# Altium PCB Sub_B_PCB_2.PcbDoc
Units mil, origin at the board's own origin, x right, y up, seen from the top; angles counter-clockwise.
Board outline 2500 x 1500 mil, 2 copper layers (Top Layer, Bottom Layer); 37 components, 25 nets, 105 pads, 26 vias.
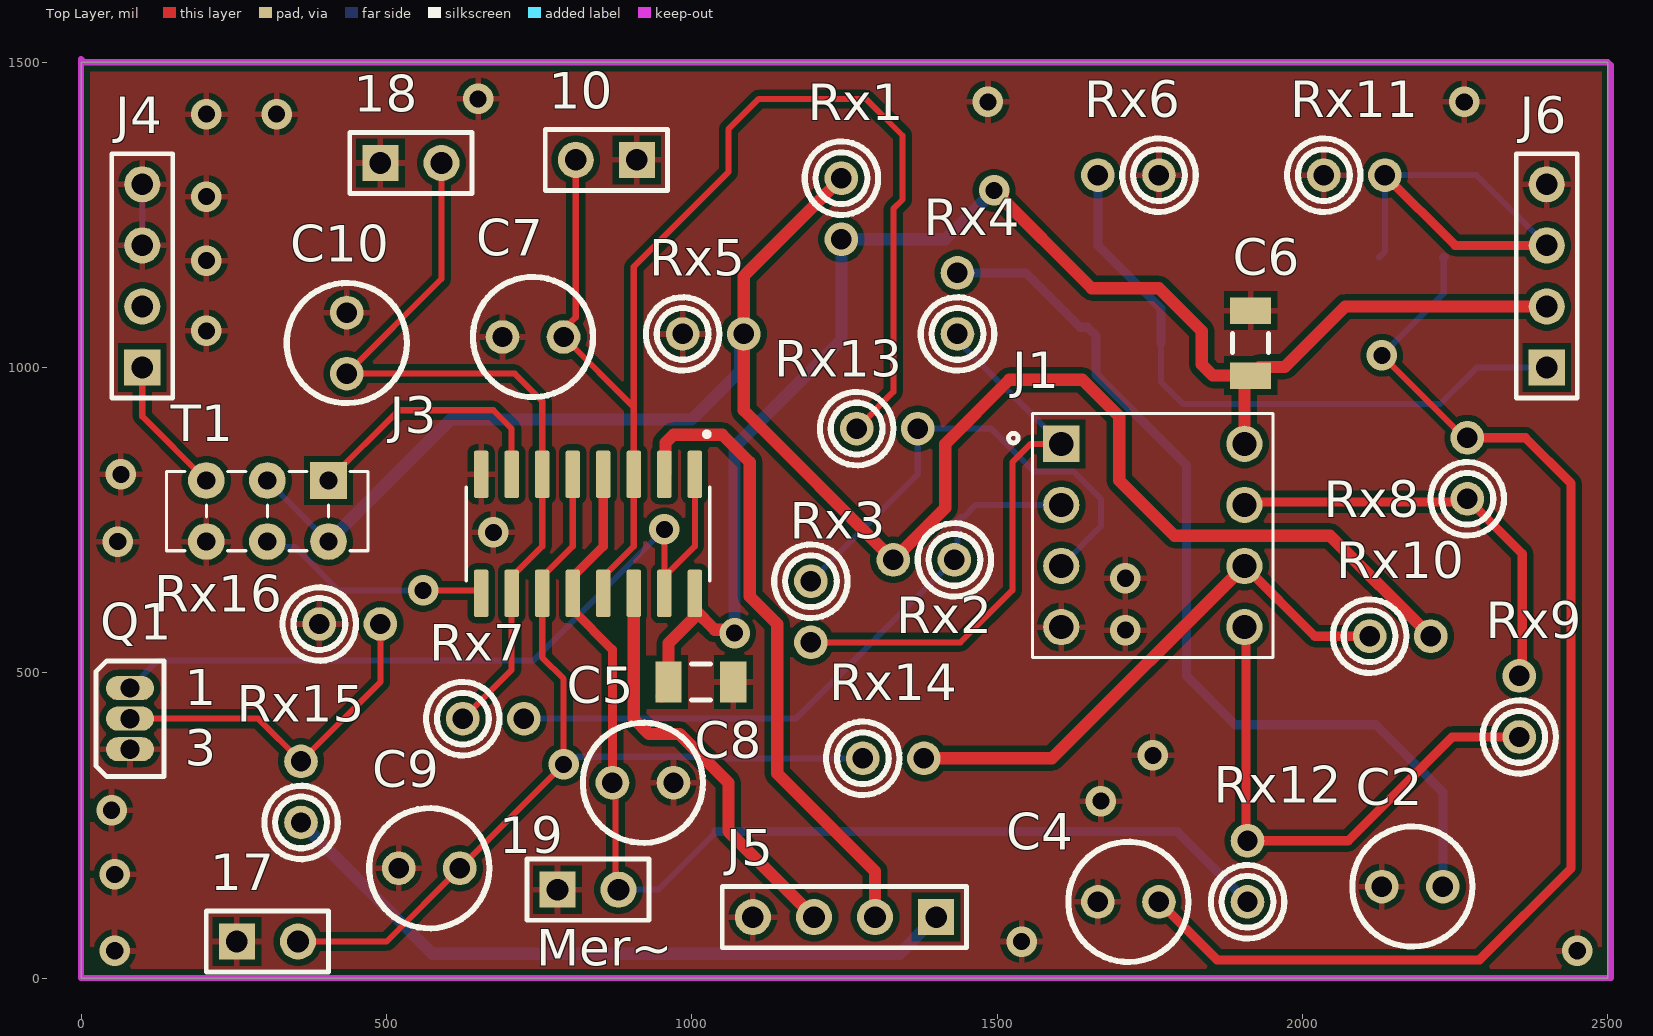
[diagram p0: Top Layer view]
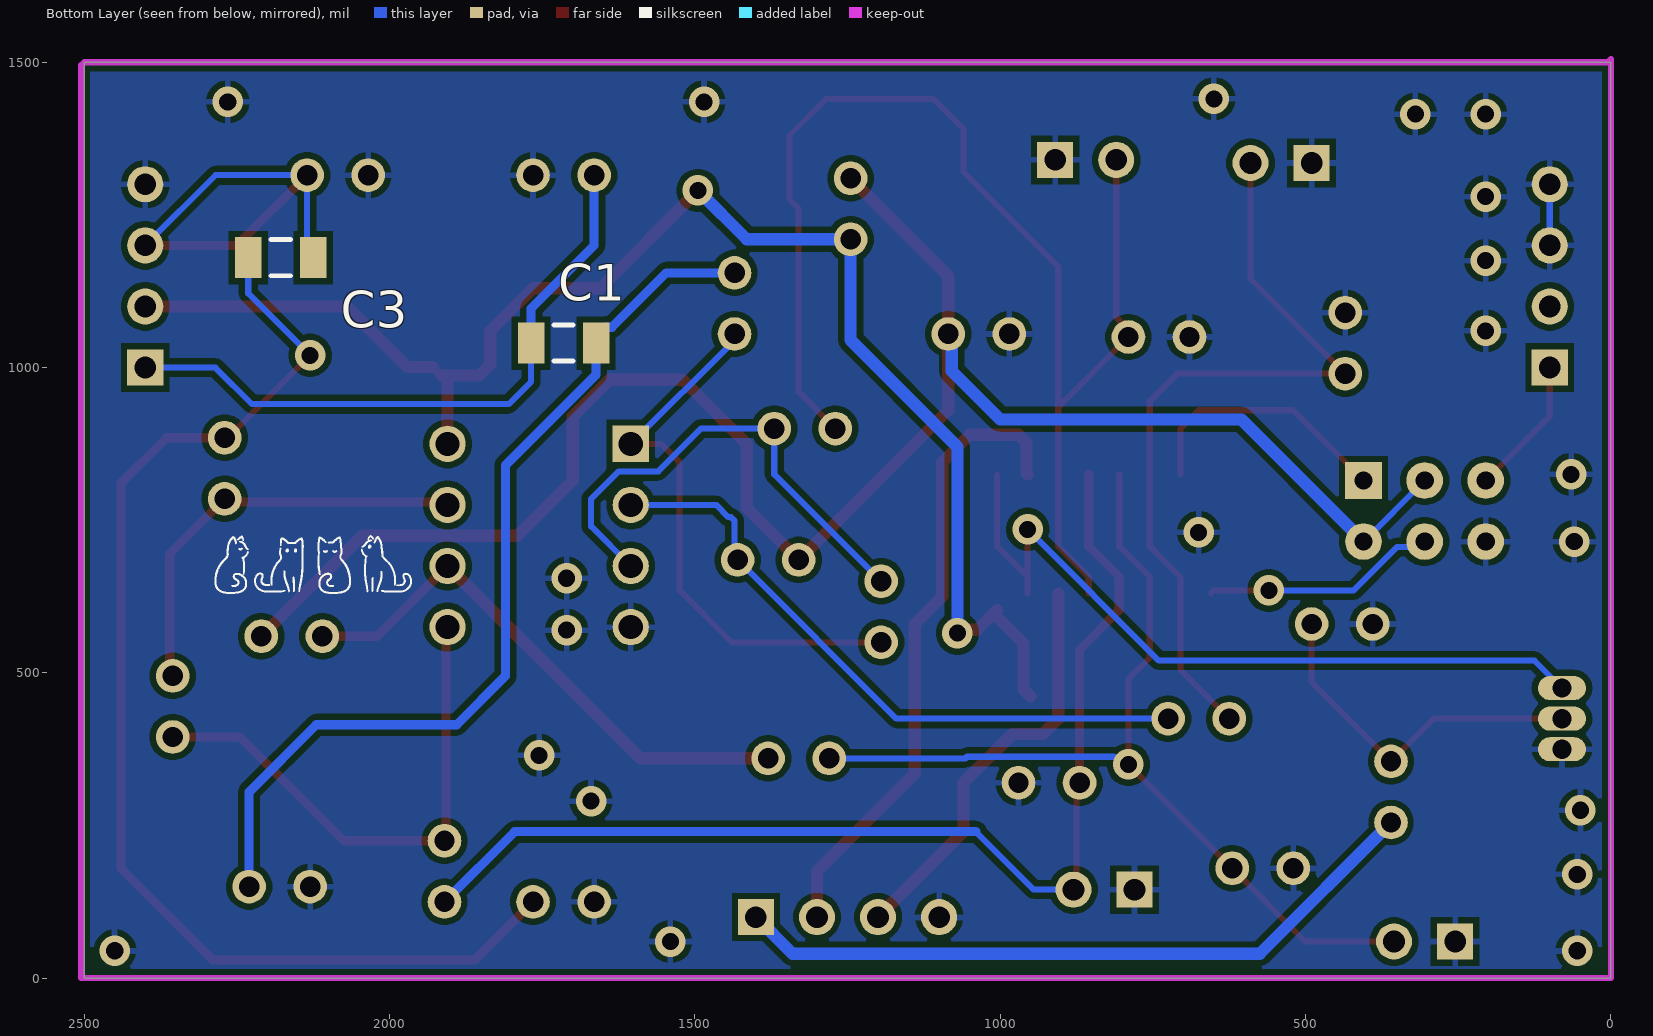
[diagram p1: Bottom Layer view, seen from below]

## Layer stack, top to bottom
Top Solder: solder mask 0.4, Solder Resist, Dk 3.5
Top Layer: signal copper 1.4
Dielectric 1: dielectric 12.6, FR-4, Dk 4.8
Bottom Layer: signal copper 1.4
Bottom Solder: solder mask 0.4, Solder Resist, Dk 3.5

## Board outline
0,0 0,1500 2500,1500 2500,0

## Design rules (kind name [scope] priority, off if disabled: settings)
Clearance [All] p1: gap=10 ignorepadtopadclearanceinfootprint=FALSE except(0: Arc-Hole Track-Hole SMDPad-Hole THPad-Hole Via-Hole Fill-Hole Poly-Hole Region-Hole Text-Hole)
HoleSize [All] p1: absolutevalues=TRUE maxlimit=900 minlimit=12 maxpercent=80.000 minpercent=20.000
MinimumSolderMaskSliver [All] p1: minsoldermaskwidth=1
PolygonConnect [All] p1: connectstyle=Relief reliefconductorwidth=10 reliefentries=4 polygonreliefangle="90 Angle" airgapwidth=10
RoutingVias [All] p1: holewidth=12 width=24 viastyle="Through Hole" minholewidth=12 minwidth=24 maxholewidth=100 maxwidth=200
SilkToSilkClearance [All] p1: silktosilkclearance=0
SilkToSolderMaskClearance [IsPad] p1: minsilkscreentomaskgap=1 clearancetoexposedcopper=TRUE
SolderMaskExpansion [All] p1: expansion=4 istentingtop=FALSE
Width [All] p1: maxlimit=200 minlimit=10 preferedwidth=10
26 further rules are at their usual default settings.

## Components (designator, comment, footprint, x,y, rotation, side; value= is the part's Value field where it differs from the comment)
10 "BUS1_0_TP" HDR1X2 910,1340 r180 top
17 "BUS1_270_TP" HDR1X2 255,60 r0 top
18 "BUS1_180_TP" HDR1X2 490,1335 r0 top
19 "BUS1_90_TP" HDR1X2 780,145 r0 top
C1 "Cap" 1206#1 1715,1040 r0 bottom value=10UF
C2 "Cap" RADIAL-0.1 2180,150 r0 top value=100PF
C3 "Cap" 1206#1 2178.17,1179.98 r180 bottom value=10UF
C4 "Cap" RADIAL-0.1 1715,125 r0 top value=100PF
C5 "Cap" 1206#2 1015,485 r180 top value=10UF
C6 "Cap" 1206#1 1915,1040 r270 top value=10UF
C7 "Cap" RADIAL-0.1 740,1050 r0 top value=0.22UF
C8 "Cap" RADIAL-0.1 920,320 r180 top value=0.22UF
C9 "Cap" RADIAL-0.1 570,180 r0 top value=0.22UF
C10 "Cap" RADIAL-0.1 435,1040 r270 top value=0.22UF
J1 "OP_AMP_SOCKET" TE_1-2199298-2 1755,725 r0 top
J3 "FST3253" SOIC127P600X175-16N 830,727.56 r270 top
J4 "Header 4" HDR1X4 100,1000 r90 top
J5 "Header 4" HDR1X4 1400,100 r180 top
J6 "Header 4" HDR1X4 2400,1000 r90 top
Q1 "MOSFET-N" E3 80,425 r0 top
Rx1 "Res1" AXIAL-0.1-RES 1245,1260 r270 top value=100K
Rx2 "Res1" AXIAL-0.1-RES 1380,685 r180 top value=3.3K
Rx3 "Res1" AXIAL-0.1-RES 1195,600 r270 top value=3.3K
Rx4 "Res1" AXIAL-0.1-RES 1435,1105 r90 top value=15K
Rx5 "Res1" AXIAL-0.1-RES 1035,1055 r0 top value=100K
Rx6 "Res1" AXIAL-0.1-RES 1715,1315 r180 top value=100K
Rx7 "Res1" AXIAL-0.1-RES 675,425 r0 top value=56
Rx8 "Res1" AXIAL-0.1-RES 2270,835 r90 top value=15K
Rx9 "Res1" AXIAL-0.1-RES 2355,445 r90 top value=3.3K
Rx10 "Res1" AXIAL-0.1-RES 2160,560 r0 top value=3.3K
Rx11 "Res1" AXIAL-0.1-RES 2085,1315 r0 top value=100K
Rx12 "Res1" AXIAL-0.1-RES 1910,175 r90 top value=56
Rx13 "Res1" AXIAL-0.1-RES 1320,900 r0 top value=56
Rx14 "Res1" AXIAL-0.1-RES 1330,360 r0 top value=56
Rx15 "Res1" AXIAL-0.1-RES 360,305 r90 top value=12K
Rx16 "Res1" AXIAL-0.1-RES 440,580 r0 top value=22K
T1 "Trans CT" BIFILAR-2402 405,815 r180 top

## Footprints (in the part's own frame and the unit in brackets; to place one, negate y for a bottom-side part, rotate by r counter-clockwise, add the part's x,y. Pads: shape width x height; smd on the part's side, far side on the other; paste and mask are expansions set on the pad)
1206#1 [mm] "Chip Capacitor, Body 3.2x1.6mm, IPC High Density"
  rect 1.1x1.7 smd: 1(-1.35,0) 2(1.35,0)
  silkscreen extent -0.4,-0.75 0.4,0.75, body extent -1.7,-0.9 1.7,0.9, height 1.3
1206#2 [mm] "Chip Capacitor, Body 3.2x1.6mm, IPC High Density"
  rect 1.1x1.7 smd: 2(1.35,0) 3(-1.35,0)
  silkscreen extent -0.4,-0.75 0.4,0.75, body extent -1.7,-0.9 1.7,0.9, height 1.3
AXIAL-0.1-RES [mm] "Axial Device, Thru-Hole; 2 Leads; 0.3 in Pin Spacing"
  round 1.4 hole 0.85: 1(-1.27,0) 2(1.27,0)
  silkscreen extent -2.8,-1.53 0.26,1.53
BIFILAR-2402 [mil]
  rect 60x60 hole 30: 1(0,0)
  round 60 hole 30: 2(0,100) 2(100,0) 3(100,100) 4(200,0) 5(200,100)
  silkscreen extent -65,-15 265,115
E3 [mm] "TO, Flat Index; 3 In-Line, Axial Leads; Body Dia. 4.6mm; Lead Dia. 0.5 mm (max)"
  oval 2x1 hole 0.8: 1(0,1.27) 2(0,0) 3(0,-1.27)
  silkscreen extent -1.41,-2.41 1.41,2.41
HDR1X2 [mm] "Connector; Header; 2 Position"
  rect 1.5x1.5 hole 0.9: 1(0,0)
  round 1.5 hole 0.9: 2(2.54,0)
  silkscreen extent -1.27,-1.27 3.81,1.27
HDR1X4 [mm] "Connector; Header; 4 Position"
  rect 1.5x1.5 hole 0.9: 1(0,0)
  round 1.5 hole 0.9: 2(2.54,0) 3(5.08,0) 4(7.62,0)
  silkscreen extent -1.27,-1.27 8.89,1.27
RADIAL-0.1 [mm] "Axial Device, Thru-Hole; 2 Leads; 0.3 in Pin Spacing"
  round 1.4 hole 0.85: 1(-1.27,0) 2(1.27,0)
  silkscreen extent -2.5,-2.5 2.5,2.5
SOIC127P600X175-16N [mm]
  rrect25% 1.97x0.6 smd: 1(-2.475,4.445) 2(-2.475,3.175) 3(-2.475,1.905) 4(-2.475,0.635) 5(-2.475,-0.635) 6(-2.475,-1.905) 7(-2.475,-3.175) 8(-2.475,-4.445) 9(2.475,-4.445) 10(2.475,-3.175) 11(2.475,-1.905) 12(2.475,-0.635) 13(2.475,0.635) 14(2.475,1.905) 15(2.475,3.175) 16(2.475,4.445)
  silkscreen extent -4.24,-5.06 1.95,5.06
TE_1-2199298-2 [mm]
  rect 1.508x1.508 hole 1: 1(-3.81,3.81)
  round 1.508 hole 1: 2(-3.81,1.27) 3(-3.81,-1.27) 4(-3.81,-3.81) 5(3.81,-3.81) 6(3.81,-1.27) 7(3.81,1.27) 8(3.81,3.81)
  silkscreen extent -6,-5.08 5,5.08

## Part data
10 17 18 19: library part "Header 2", "Header, 2-Pin", LatestRevisionDate=17-Jul-2002, LatestRevisionNote="Re-released for DXP Platform.", Publisher="Altium Limited"
C1 C3 C5 C6: library part "CAP CER 10UF 16V X5R 1206", "Capacitor", Manufacturer Part Number=885012108017, Voltage Rating=16V, LatestRevisionDate=17-Jul-2002, LatestRevisionNote="Re-released for DXP Platform.", Published=8-Jun-2000, Publisher="Altium Limited"
C2 C4: library part "CAP CER 100PF 50V C0G/NP0 RADIAL", "Capacitor", Manufacturer Part Number=K101K15C0GF53L2, Voltage Rating=50V, LatestRevisionDate=17-Jul-2002, LatestRevisionNote="Re-released for DXP Platform.", Published=8-Jun-2000, Publisher="Altium Limited"
C7 C8 C9 C10: library part "CAP CER 0.22UF 50V Z5U RADIAL", "Capacitor", Manufacturer Part Number=C320C224M5U5TA, Voltage Rating=50V, LatestRevisionDate=17-Jul-2002, LatestRevisionNote="Re-released for DXP Platform.", Published=8-Jun-2000, Publisher="Altium Limited"
J1: library part 1-2199298-2, "8 _2 x 4_ Pos DIP, 0.3 _7.62mm_ Row Spacing Socket Tin Through Hole", Package=None, Availability=Unavailable, MF="TE Connectivity", MP=1-2199298-2, Price=None, SnapEDA_Link=https://www.snapeda.com/parts/1-2199298-2/TE%20Connectivity%20AMP%20Connectors/view-part/2761758/?ref=snap, Supplier 1=RSComponents, Supplier 2=RSComponents, Supplier Part Number 2=6742435, TE_purchase_URL=https://www.te.com/usa-en/product-1-2199298-2.html?te_bu=Cor&te_type=disp&te_campaign=seda_glo_cor-seda-global-disp-prtnr-fy19-seda-model-bom-cta_sma-317_1&elqCampaignId=32493
J3: "Multiplekser/demultiplekser 2 x 4:1 16-TSSOP", Package="TSSOP-16 ON Semiconductor", Availability="In Stock", Check_prices=https://www.snapeda.com/parts/FST3253/Onsemi/view-part/?ref=eda, MF="ON Semiconductor", MP=FST3253, Price=None, Purchase-URL=https://pricing.snapeda.com/search/part/FST3253/?ref=eda, SnapEDA_Link=https://www.snapeda.com/parts/FST3253/Onsemi/view-part/?ref=snap
J4 J5 J6: "Header, 4-Pin", LatestRevisionDate=17-Jul-2002, LatestRevisionNote="Re-released for DXP Platform.", Publisher="Altium Limited"
Q1: "N-Channel MOSFET", Supplier Part Number 1=BS170-D74Z, LatestRevisionDate=17-Jul-2002, LatestRevisionNote="Re-released for DXP Platform.", PackageDescription="TO, Flat Index; 3 In-Line, Axial Leads; Body Dia. 4.6mm; Lead Dia. 0.5 mm (max)", PackageReference=E3, PackageVersion=1995/1996, Published=8-Jun-2000, Publisher="Altium Limited", Supplier 1=Avnet
Rx1 Rx5 Rx6 Rx11: library part "RES 100K OHM 5% 1/4W AXIAL", "Resistor", Manufacturer Part Number=CFR-25JB-52-100K, Power Rating=1/4W, Tolerance=0.05, LatestRevisionDate=17-Jul-2002, LatestRevisionNote="Re-released for DXP Platform.", Published=8-Jun-2000, Publisher="Altium Limited"
Rx2 Rx3 Rx9 Rx10: library part "RES 3.3K OHM 5% 1/4W AXIAL", "Resistor", Manufacturer Part Number=CFR-25JB-52-3K3, Power Rating=1/4W, Tolerance=0.05, LatestRevisionDate=17-Jul-2002, LatestRevisionNote="Re-released for DXP Platform.", Published=8-Jun-2000, Publisher="Altium Limited"
Rx4 Rx8: library part "RES 15K OHM 5% 1/4W AXIAL", "Resistor", Manufacturer Part Number=CFR-25JB-52-15K, Power Rating=1/4W, Tolerance=0.05, LatestRevisionDate=17-Jul-2002, LatestRevisionNote="Re-released for DXP Platform.", Published=8-Jun-2000, Publisher="Altium Limited"
Rx7 Rx12 Rx13 Rx14: library part "RES 56 OHM 5% 1/4W AXIAL", "Resistor", Manufacturer Part Number=CFR-25JB-52-56R, Power Rating=1/4W, Tolerance=0.05, LatestRevisionDate=17-Jul-2002, LatestRevisionNote="Re-released for DXP Platform.", Published=8-Jun-2000, Publisher="Altium Limited"
Rx15: library part "RES 12K OHM 5% 1/4W AXIAL", "Resistor", Manufacturer Part Number=CFR-25JB-52-12K, Power Rating=1/4W, Tolerance=0.05, LatestRevisionDate=17-Jul-2002, LatestRevisionNote="Re-released for DXP Platform.", Published=8-Jun-2000, Publisher="Altium Limited"
Rx16: library part "RES 22K OHM 5% 1/4W AXIAL", "Resistor", Manufacturer Part Number=CFR-25JB-52-22K, Power Rating=1/4W, Tolerance=0.05, LatestRevisionDate=17-Jul-2002, LatestRevisionNote="Re-released for DXP Platform.", Published=8-Jun-2000, Publisher="Altium Limited"
T1: library part "Centre-tapped transformer wound on a binocular core", "Center-Tapped Transformer (Coupled Inductor Model)", LatestRevisionDate=17-Jul-2002, LatestRevisionNote="Re-released for DXP Platform.", Published=8-Jun-2000, Publisher="Altium Limited"

## Via types
v1: diameter 50, hole 28, Top Layer to Bottom Layer, 22 vias
v2: diameter 50, hole 28, Top Layer to Bottom Layer, tented top, 4 vias

## Nets (pads, with @x,y where several pads share a name; then routed paths per layer and width w, separated by ;. In a path a pad name is that pad's centre, name@x,y a point inside that pad or via, vN(x,y) a via of type N, cw(c..) or ccw(c..) an arc to the next point about the centre after c; other vN are vias at no path point)
GND: 10.1 17.1 18.1 19.1 C2.1 C4.1 C5.3 C6.1 C7.1 C8.1 C9.1 C10.1 J1.4 J3.8 J4.3 J4.4 J5.4 J6.4 Q1.3 Rx5.1 Rx6.1 Rx11.1 Rx16.1 T1.5 | length 100
  Bottom Layer w10: J4.3 J4.4
  other v1: 55,45 2450,45 1540,60 55,170 50,275 1670,290 1755,365 60,715 65,825 205,1060 205,1175 205,1280 205,1415 320,1415 1485,1435 2265,1435 650,1440
  other v2: 1710,570 1710,655 675,730
Net10_2: 10.2 C7.2 J3.3 J3.13 Rx13.1 | length 2147.3
  Top Layer w10: 10.2 810,1082.21 790,1062.21 C7.2 905,935 ; J3.13 855,657.09 905,707.09 J3.3 905,935 ; Rx13.1 1330,960 1330,1260 1345,1275 1345,1380 1285,1440 1110,1440 1060,1390 1060,1320 905,1165 905,935
Net17_2: 17.2 C9.2 J3.5 J3.11 Rx14.1 | length 1561.6
  Top Layer w10: 17.2 500,60 C9.2 v1(790,350) 790,490 755,525 J3.11 755,657.09 805,707.09 J3.5
  Bottom Layer w10: v1(790,350) 800.82,350 813.38,362.56 1054.49,362.56 1057.04,360 Rx14.1
Net18_2: 18.2 C10.2 J3.6 J3.10 Rx7.1 | length 1321.7
  Top Layer w10: 18.2 590,1145 C10.2 710,990 755,945 J3.6 755,707.09 705,657.09 J3.10 705,505 Rx7.1
Net19_2: 19.2 C8.2 J3.4 J3.12 Rx12.1 | length 1848.8
  Top Layer w10: C8.2 875,315 875,150 19.2
  Top Layer w15: J3.4 855,707.09 805,657.09 J3.12 805,603.15 870,538.15 C8.2
  Bottom Layer w10: 19.2 945,145 1040,240
  Bottom Layer w15: 1040,240 1795,240 Rx12.1
NetC1_1: C1.1 C2.2 Rx4.2 | length 1541.5
  Bottom Layer w15: Rx4.2 1546.85,1155 1635.89,1065.96 1647.7,1065.96 1661.85,1051.81 C1.1 1661.85,988.15 1810,840 1810,495 1890,415 2120,415 2230,305 C2.2
NetC1_2: C1.2 J6.1 Rx6.2 | length 1052.8
  Bottom Layer w10: C1.2 1768.15,976.85 1805,940 2225.24,940 2285.24,1000 J6.1
  Bottom Layer w15: Rx6.2 1665,1200 1768.15,1096.85 C1.2
NetC3_1: C3.1 C4.2 Rx8.2 | length 2013.8
  Top Layer w10: v1(2130,1020) 2265,885 Rx8.2
  Top Layer w15: C4.2 1860,30 2290,30 2440,180 2440,810 2365,885 Rx8.2
  Bottom Layer w10: v1(2130,1020) 2231.32,1121.32 C3.1
  Bottom Layer w15: C3.1 C3.1@2232.24,1180.91 ; Rx8.2@2269.07,885.93 Rx8.2 Rx8.2@2274.07,880.93
NetC3_2: C3.2 J6.3 Rx11.2 | length 764.4
  Top Layer w15: Rx11.2 2250,1200 J6.3
  Bottom Layer w10: C3.2 2135,1189.96 Rx11.2 2285,1315 J6.3
NetC5_2: C5.2 C6.2 J1.8 J3.16 J6.2 Rx1.2 | length 2457.3
  Top Layer w15: C6.2@1905,976.85 C6.2 C6.2@1929.11,1000.96
  Top Layer w20: C5.2@950.2,461.54 961.85,473.19 C5.2 961.85,548.46 1003.19,589.8 ; J3.16@1005,603.15 1037.41,570.74 1064.26,570.74 v1(1070,565) ; v1(1495,1290) 1655,1130 1765,1130 1835,1060 1835,1005 1853.15,986.85 C6.2 ; J1.8 C6.2@1905,976.85 ; C6.2@1929.11,1000.96 1970.96,1000.96 2070,1100 J6.2
  Bottom Layer w20: v1(1070,565) 1070,870 1245,1045 Rx1.2 1415,1210 v1(1495,1290)
NetJ1_1: J1.1 Rx3.2 Rx4.1 | length 918.1
  Top Layer w10: Rx3.2 1440,550 1525,635 1525,845 1555,875 J1.1
  Bottom Layer w10: Rx4.1 1435,1045 J1.1
NetJ1_2: J1.2 Rx2.1 Rx7.2 | length 1059.6
  Bottom Layer w10: Rx7.2 1170,425 Rx2.1 1435,690 1435,749.14 1440.86,755 1445,755 1465,775 J1.2
NetJ1_3: J1.3 Rx3.1 Rx13.2 | length 807
  Bottom Layer w10: Rx3.1 1370,825 Rx13.2 1490,900 1560,830 1625,830 1670,785 1670,740 J1.3
NetJ1_5: J1.5 Rx9.1 Rx12.2 | length 867.5
  Top Layer w15: J1.5 1907.5,572.5 1907.5,227.5 Rx12.2 2075,225 2245,395 Rx9.1
NetJ1_6: J1.6 Rx10.1 Rx14.2 | length 908.1
  Top Layer w15: J1.6 2020,560 Rx10.1
  Top Layer w20: Rx14.2 1590,360 J1.6
NetJ1_7: J1.7 Rx8.1 Rx9.2 | length 698.5
  Top Layer w15: J1.7 1910,780 2265,780 Rx8.1 2360,695 2360,500 Rx9.2
NetJ3_1: J3.1 J3.15 Q1.1 | length 1295.9
  Top Layer w10: Q1.1 Q1.1@99.68,475 ; J3.15 J3.15@955,657.09 ; v2(955,735) J3.15@955,657.09 ; J3.1 1005,707.09 J3.15@955,657.09
  Bottom Layer w10: Q1.1 125,520 740,520 v2(955,735)
NetJ3_2: J3.2 J5.2 | length 1044.8
  Top Layer w20: J3.2 956.81,826.81 956.81,876.81 970,890 1050,890 1095,845 1095,625 1140,580 1140,335 1300,175 J5.2
NetJ3_7: J3.7 T1.1 | length 435.1
  Top Layer w10: T1.1 520,930 675,930 705,900 J3.7
NetJ3_9: J3.9 T1.3 | length 385.2
  Top Layer w10: v1(560,635) 650.12,635 J3.9
  Bottom Layer w10: T1.3 313.64,706.36 350,706.36 421.36,635 v1(560,635)
NetJ3_14: J3.14 J5.3 | length 681.6
  Top Layer w20: J3.14 905,425 930,400 980,400 1060,320 1060,240 J5.3
NetJ4_1: J4.1 T1.4 | length 228.5
  Top Layer w10: J4.1 100,920 T1.4
NetJ5_1: J5.1 Rx15.1 | length 1153.9
  Bottom Layer w20: Rx15.1 575,40 1340,40 J5.1
NetQ1_2: Q1.2 Rx15.2 Rx16.2 | length 587.8
  Top Layer w10: Q1.2 290,425 Rx15.2 490,485 Rx16.2
NetRx1_1: Rx1.1 Rx2.2 Rx5.2 Rx10.2 T1.2 | length 3086.4
  Top Layer w20: Rx1.1 1085,1150 Rx5.2 1085,930 Rx2.2 1415,770 1415,875 1520,980 1640,980 1700,920 1700,815 1790.31,724.69 2045.31,724.69 Rx10.2
  Bottom Layer w10: T1.2@305,815 T1.2@405,715
  Bottom Layer w20: T1.2@405,715 605,915 1000,915 1079.3,994.3 1079.3,1049.3 Rx5.2
pads on no net: J4.2

## Polygon pours and split planes (outlines as drawn)
GND on Top Layer "GND_L01_P001" (solid, pour order 1): 0,1500 2500,1500 2500,0 5,0 0,5
GND on Bottom Layer "GND_L02_P000" (solid, pour order 0): 0,1500 2500,1500 2500,0 0,0

## Keep-outs
Keep-Out Layer:
  lines w10: 0,0 2505,0 2505,1495 2500,1500 5,1500 0,1505 0,0

## Silkscreen, mask and mechanical layers (free items; w line width, h text height)
Top Overlay:
  text "Mer~" at 745,20 h60
Bottom Overlay:
  drawing of 24 lines, arcs and shapes, not listed

## Text inside footprints (layer, text, board x,y; h text height)
Q1: Top Overlay "1" at 169.57,446.85 h59.05; Top Overlay "3" at 169.57,347.72 h59.05